# Altium PCB USF-IEEE-CS.PcbDoc
Units mm, origin at the board's own origin, x right, y up, seen from the top; angles counter-clockwise.
Board outline 35.56 x 25.88 mm, 4 copper layers (Top Layer, Mid Layer 1, Mid Layer 2, Bottom Layer), stack 1.57 mm thick; 44 components, 35 nets, 220 pads, 47 vias.
Unrouted connection lines stored in the file: 93.
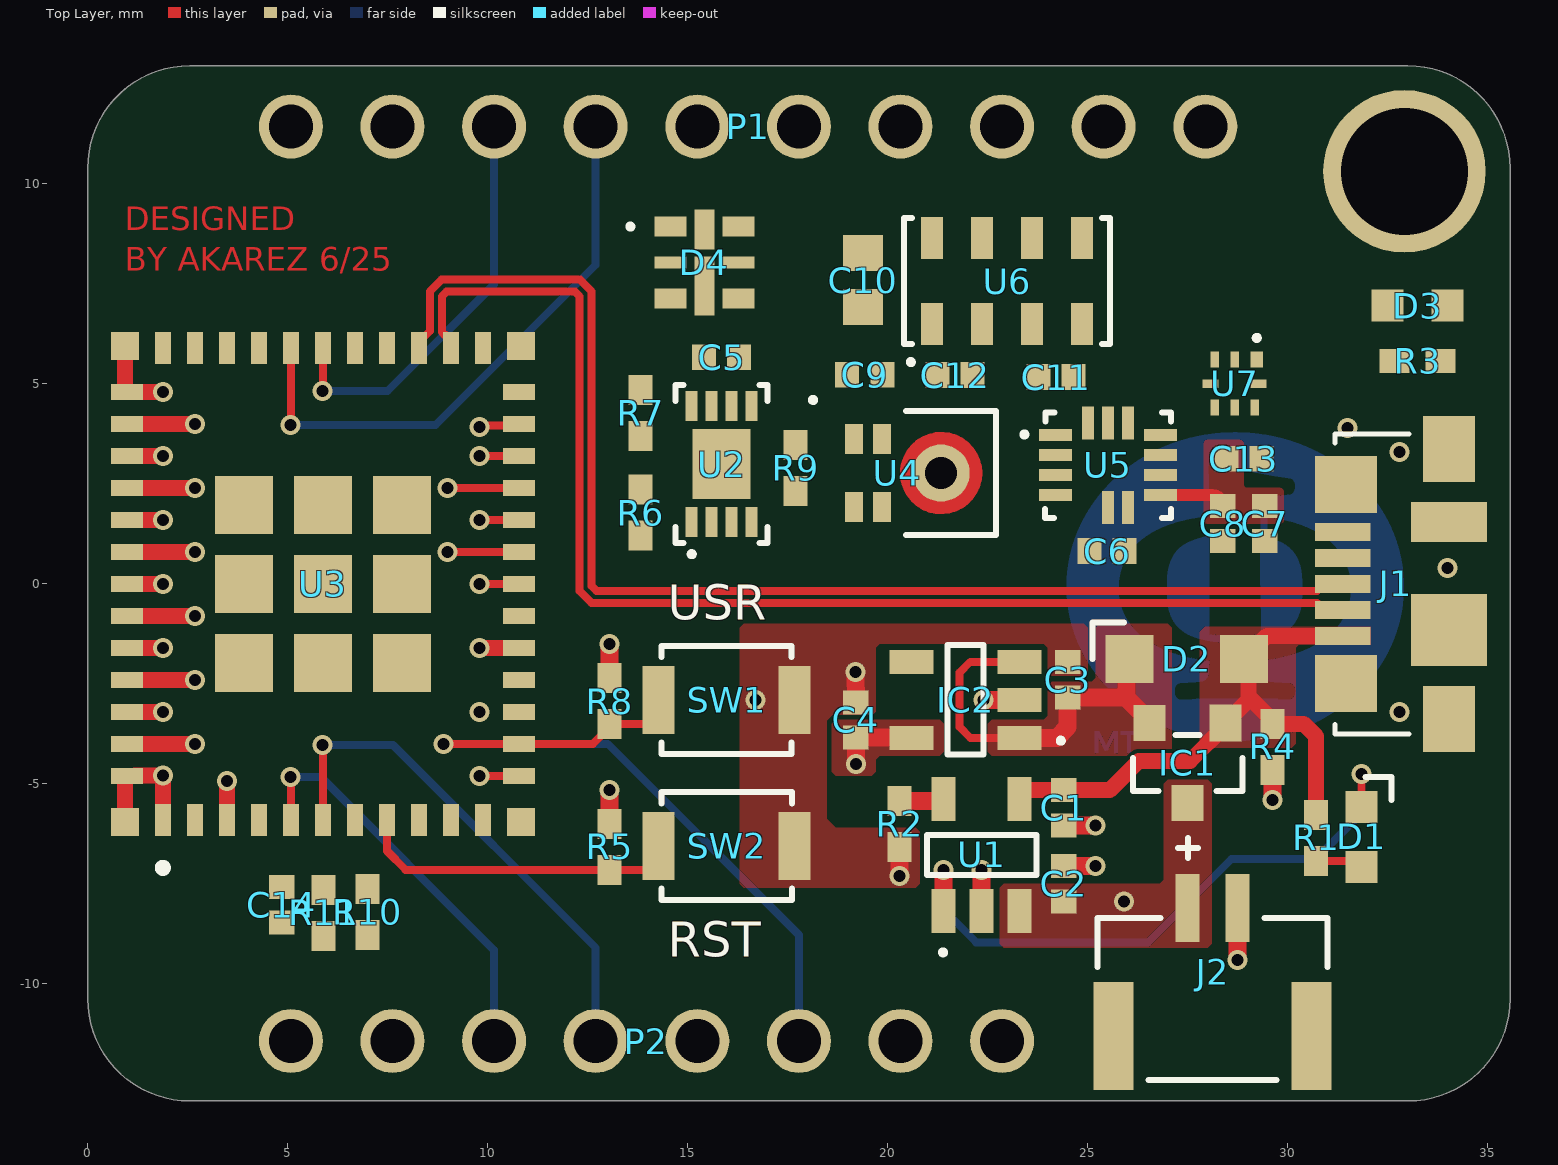
[diagram p0: Top Layer view]
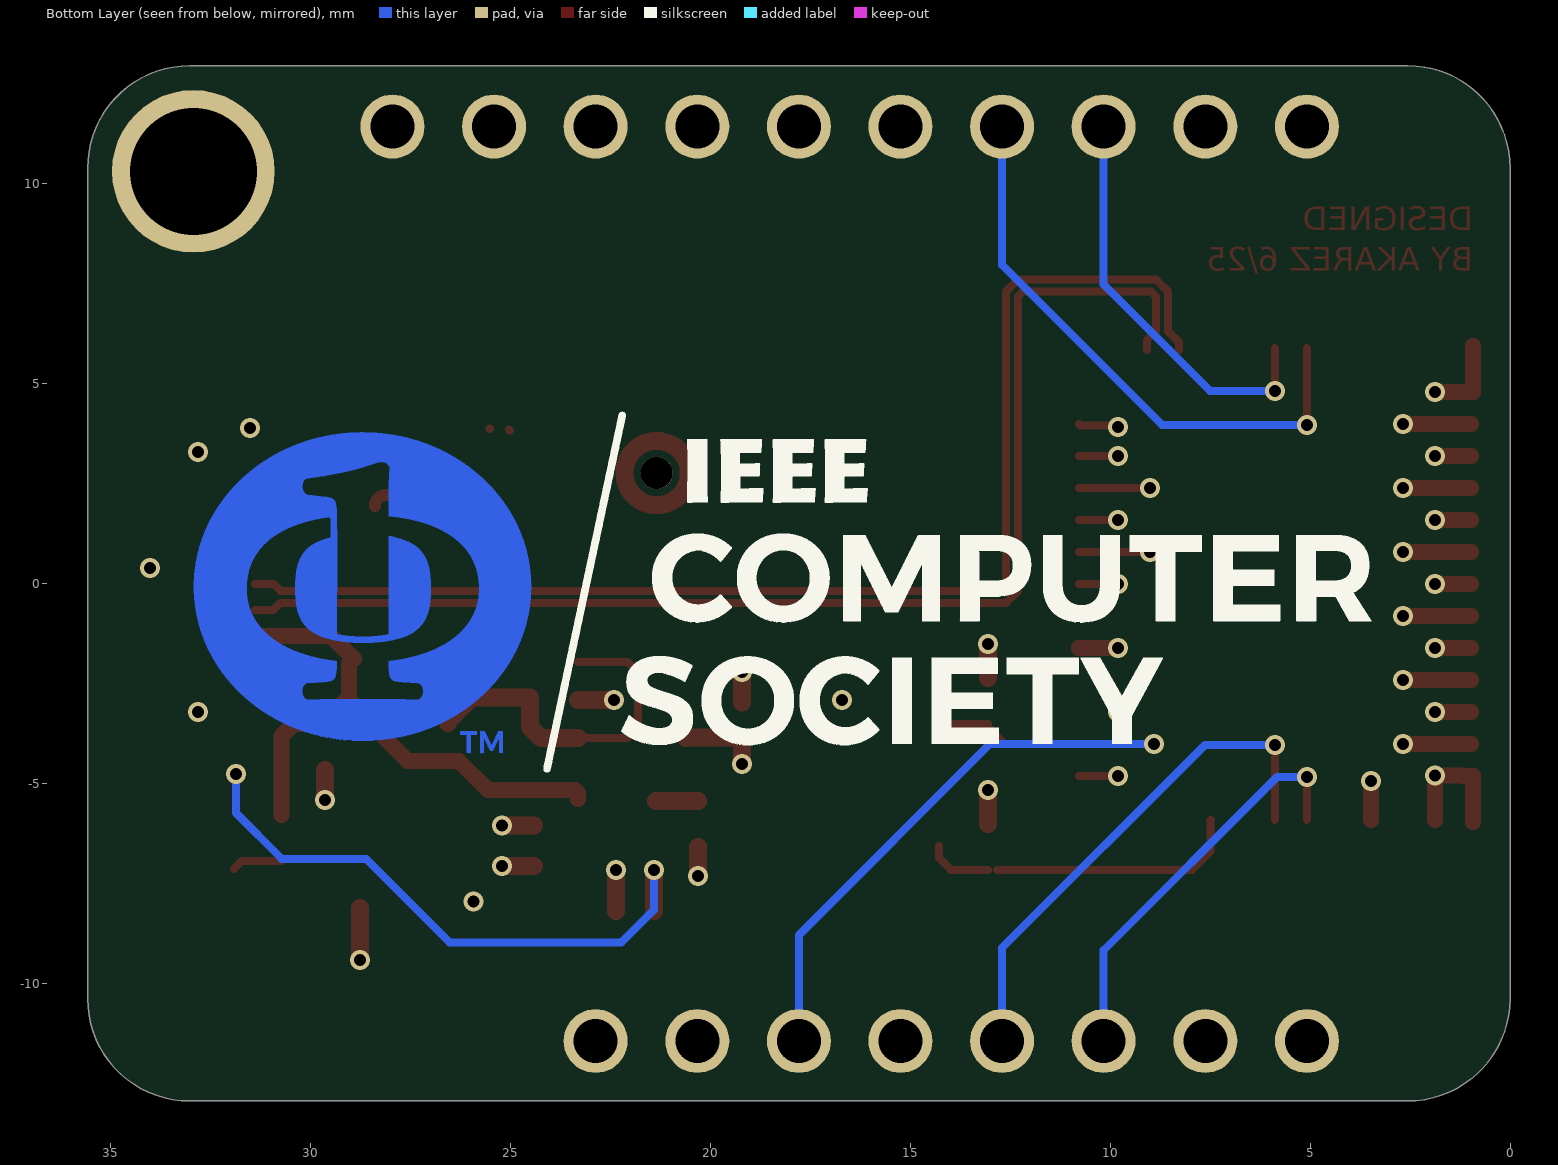
[diagram p1: Bottom Layer view, seen from below]
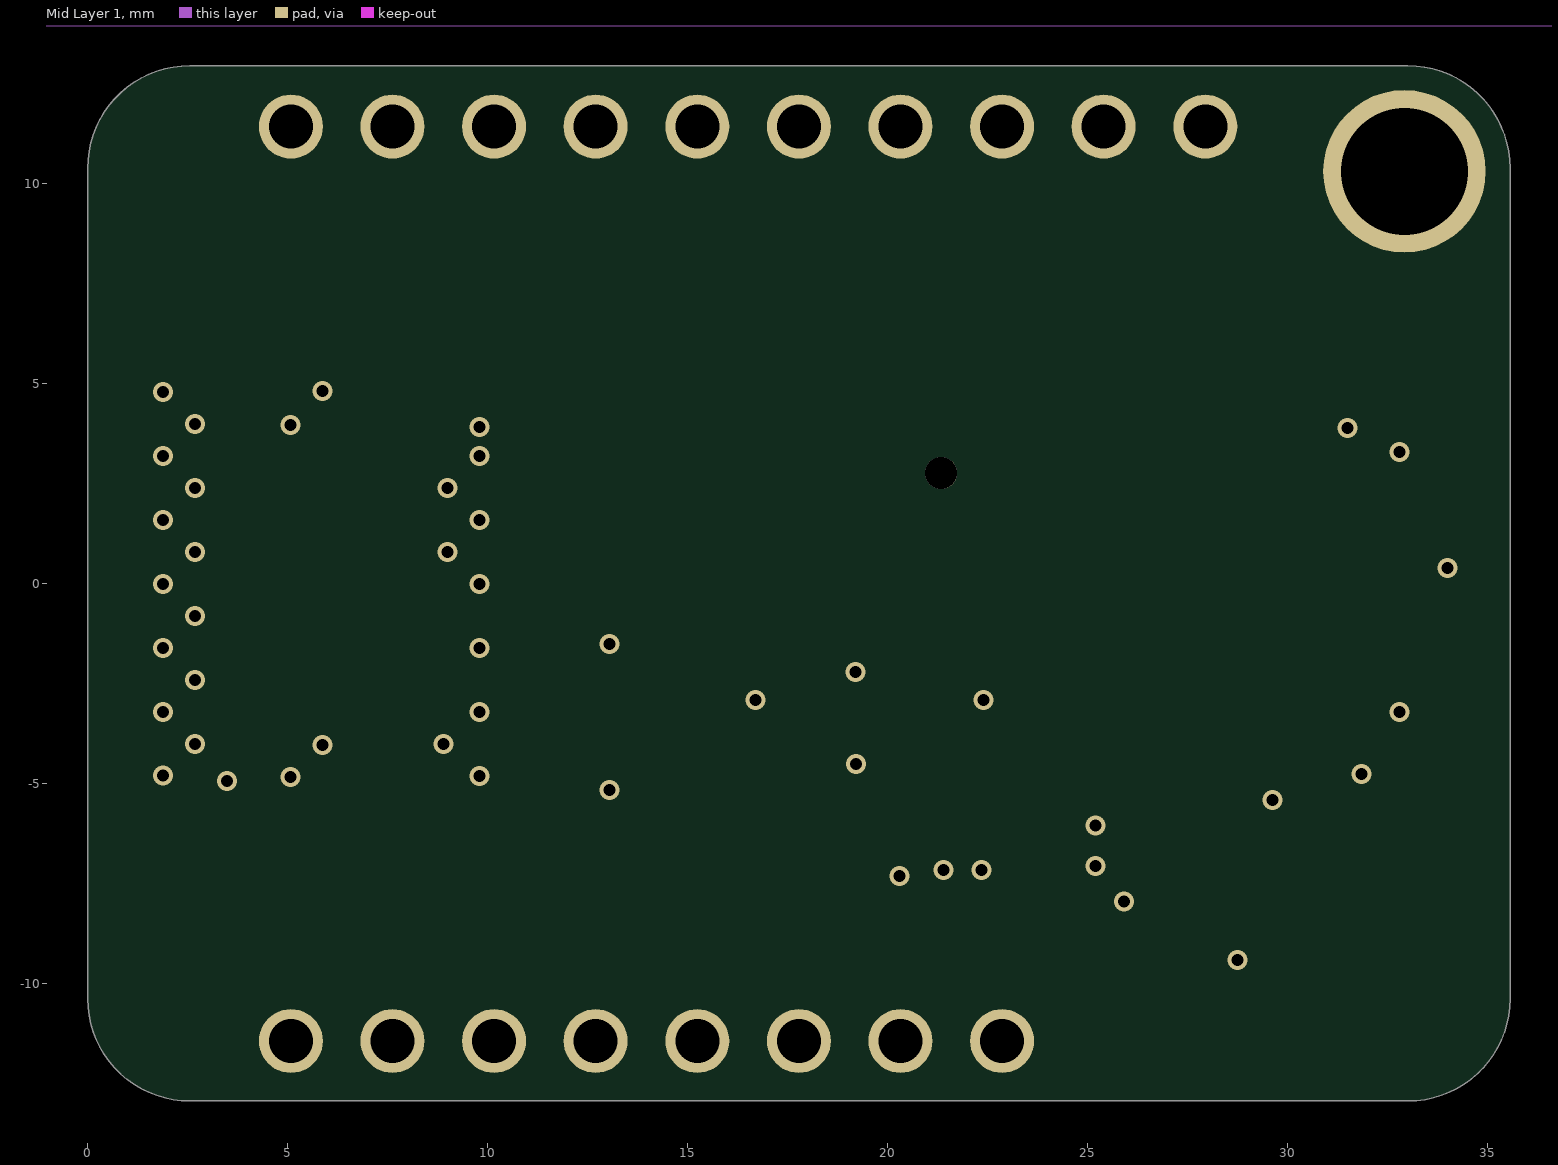
[diagram p2: Mid Layer 1]
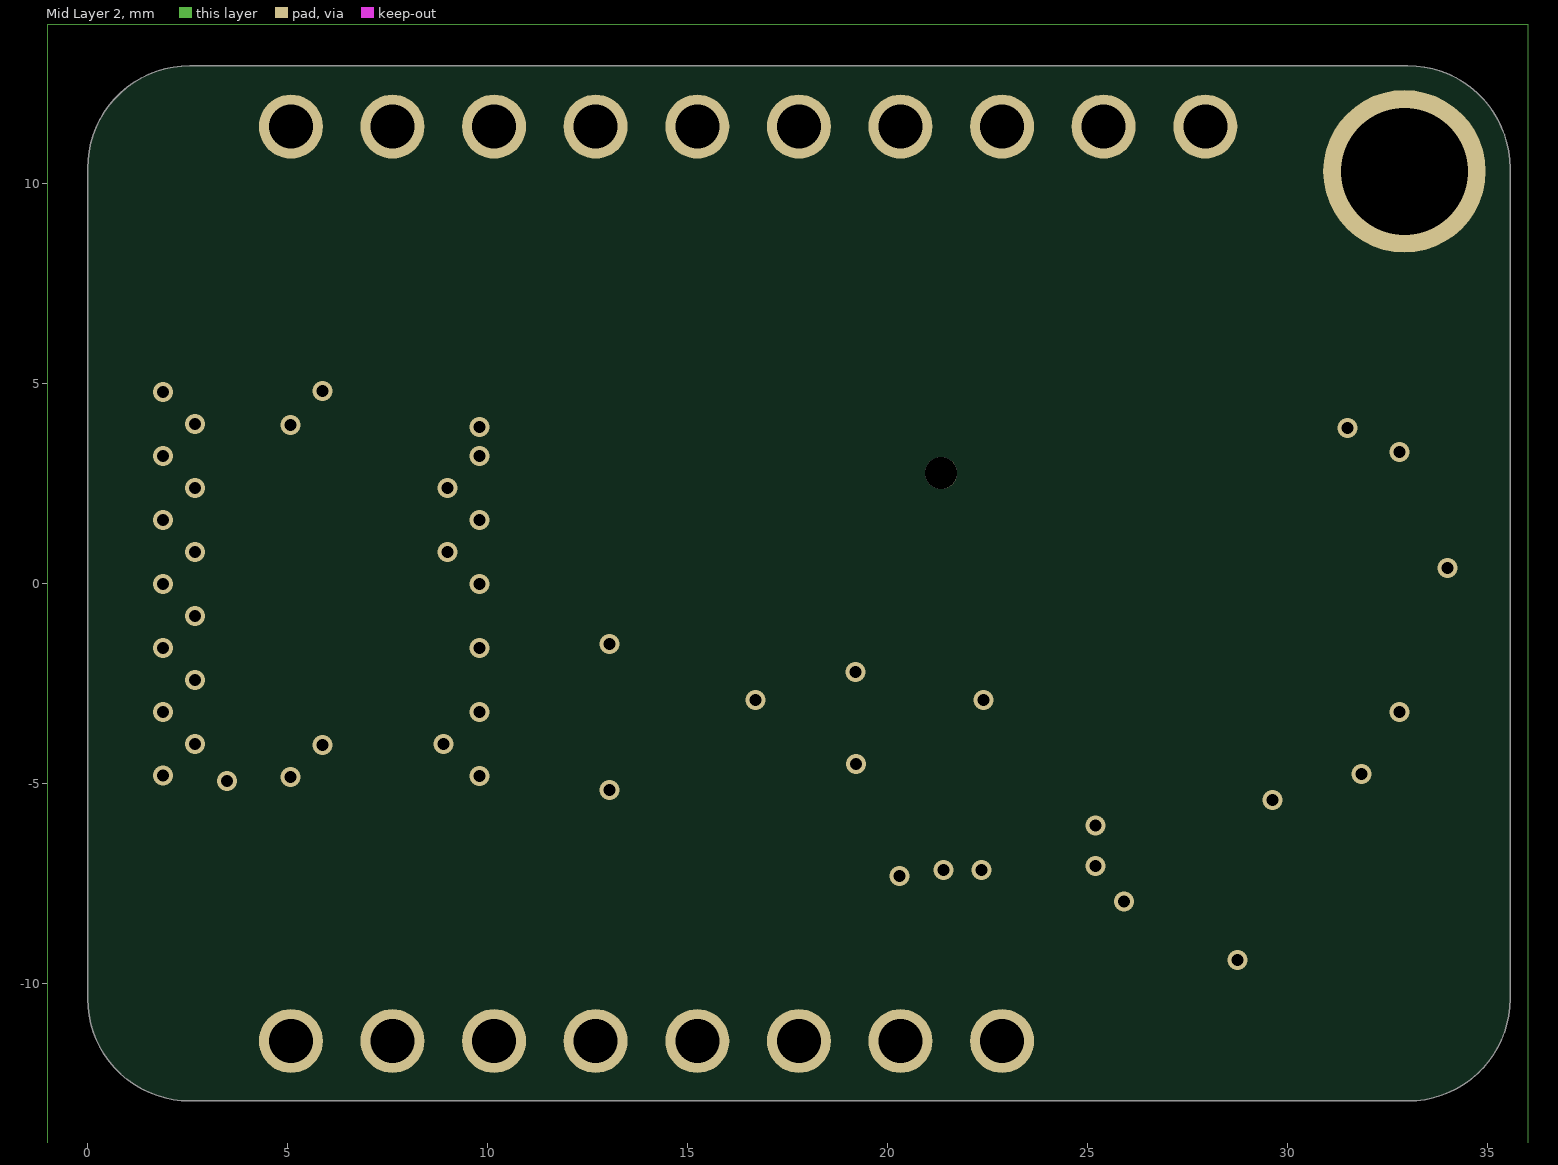
[diagram p3: Mid Layer 2]

## Layer stack, top to bottom
Top Solder: solder mask 0.0127, Solder Resist, Dk 3.8
Top Layer: signal copper 0.035
Dielectric 1: prepreg 0.2, 7628, Dk 4.6
Mid Layer 1: signal copper 0.0175
Core: core 1.065, FR-4, Dk 4.5
Mid Layer 2: signal copper 0.0175
Dielectric 2: prepreg 0.2, 7628, Dk 4.6
Bottom Layer: signal copper 0.035
Bottom Solder: solder mask 0.0127, Solder Resist, Dk 3.8

## Board outline
2.558,-12.929 cw(c2.558,-10.371) 0,-10.371 0,10.396 cw(c2.558,10.396) 2.558,12.954 33.002,12.954 cw(c33.002,10.396) 35.56,10.396 35.56,-10.379 cw(c33.012,-10.379) 33.012,-12.927

## Design rules (kind name [scope] priority, off if disabled: settings)
BoardOutlineClearance [All] p1: gap=0.2 ignorepadtopadclearanceinfootprint=FALSE
Clearance [All] p1: gap=0.102 ignorepadtopadclearanceinfootprint=FALSE except(0.127: Arc-Via Track-Via SMDPad-Via THPad-Via Via-Via Via-Fill Via-Poly Via-Region Via-Text; 0.25: Arc-Hole Track-Hole SMDPad-Hole THPad-Hole Via-Hole Fill-Hole Poly-Hole Region-Hole Text-Hole)
ComponentClearance [All] p1: gap=0.102 collisioncheckmode=3 verticalgap=0.102 showdistances=TRUE
DiffPairsRouting [All] p1: maxlimit=0.102 minlimit=0.102 mostfreqgap=0.102 toplayer_minwidth=0.102 toplayer_maxwidth=1816.048 toplayer_prefwidth=0.102 midlayer1_minwidth=0.102 midlayer1_maxwidth=1816.048 midlayer1_prefwidth=0.102 midlayer2_minwidth=0.102 midlayer2_maxwidth=1816.048 midlayer2_prefwidth=0.102 bottomlayer_minwidth=0.102 bottomlayer_maxwidth=1816.048 bottomlayer_prefwidth=0.102 maxuncoupledlength=12.7
Height [All] p1: minheight=0 maxheight=1816.048 prefheight=12.7
HoleSize [All] p1: absolutevalues=TRUE maxlimit=6.3 minlimit=0.2 maxpercent=80.000 minpercent=20.000
HoleToHoleClearance [All] p1: gap=0.25 allowstackedmicrovias=FALSE
MinimumAnnularRing [All] p1: minimumring=0.076
MinimumSolderMaskSliver [All] p1: minsoldermaskwidth=0
PlaneClearance [All] p1: clearance=0.102
PlaneConnect PlaneConnectPowerPads [InPadClass('PowerPads')] p1: planeconnectstyle=Direct reliefexpansion=0.508 reliefentries=4 reliefconductorwidth=0.254 reliefairgap=0.254
PlaneConnect [All] p2: pad.planeconnectstyle=Relief pad.reliefexpansion=0.3 pad.reliefentries=4 pad.reliefconductorwidth=0.102 pad.reliefairgap=0.102 via.planeconnectstyle=Direct via.reliefexpansion=0.3 via.reliefentries=4 via.reliefconductorwidth=0.127 via.reliefairgap=0.127
PolygonConnect PolygonConnectPowerPads [All vs (InPadClass('PowerPads'))] p1: connectstyle=Direct reliefconductorwidth=0.254 reliefentries=4 polygonreliefangle="90 Angle" airgapwidth=0.254
PolygonConnect [All] p2: thpad.connectstyle=Relief thpad.reliefconductorwidth=0.102 thpad.reliefentries=4 thpad.polygonreliefangle="90 Angle" thpad.airgapwidth=0.102 smdpad.connectstyle=Direct smdpad.reliefconductorwidth=0.102 smdpad.reliefentries=4 smdpad.polygonreliefangle="90 Angle" smdpad.airgapwidth=0.102 via.connectstyle=Direct via.reliefconductorwidth=0.127 via.reliefentries=4 via.polygonreliefangle="90 Angle" via.airgapwidth=0.127
RoutingVias [All] p1: holewidth=0.2 width=0.45 viastyle="Through Hole" minholewidth=0.2 minwidth=0.45 maxholewidth=6.3 maxwidth=6.55
SilkToSilkClearance [All] p1: silktosilkclearance=0
SilkToSolderMaskClearance [IsPad] p1: minsilkscreentomaskgap=0.102 clearancetoexposedcopper=TRUE
SolderMaskExpansion [All] p1: expansion=0.075 istentingtop=FALSE
SupplyNets "Schematic Supply Nets_3" [InNet('GND')] p1: voltage=0.000
SupplyNets "Schematic Supply Nets_2" [InNet('+VBAT')] p2: voltage=0.000
SupplyNets "Schematic Supply Nets_1" [InNet('+VUSB')] p3: voltage=0.000
SupplyNets "Schematic Supply Nets" [InNet('+3V3')] p4: voltage=0.000
Width [All] p1: maxlimit=1816.048 minlimit=0.102 preferedwidth=0.102
20 further rules are at their usual default settings.

## Classes and differential pairs
differential pair USB_D: +USB_D_P -USB_D_N

## Components (designator, comment, footprint, x,y, rotation, side; value= is the part's Value field where it differs from the comment)
C1 "4.7 µF" "CAP 0402_1005" 24.4,-5.6 r90 top
C2 "4.7 µF" "CAP 0402_1005" 24.4,-7.5 r270 top
C3 "1 µ" "CAP 0402_1005" 24.5,-2.4 r270 top
C4 "1 µ" "CAP 0402_1005" 19.202,-3.404 r270 top
C5 "0.1 µF" "CAP 0402_1005" 15.85,5.664 r180 top
C6 "2.2 µF" "CAP 0402_1005" 25.485,0.82 r180 top
C7 "0.1 µF" "CAP 0402_1005" 29.431,1.506 r90 top
C8 "0.1 µF" "CAP 0402_1005" 28.381,1.506 r90 top
C9 "1 µ" "CAP 0402_1005" 19.425,5.226 r0 top
C10 "10 µF" "CAP 0603_1608" 19.387,7.594 r270 top
C11 "0.1 µF" "CAP 0402_1005" 24.212,5.169 r0 top
C12 "0.1 µF" "CAP 0402_1005" 21.687,5.219 r180 top
C13 "0.1 µF" "CAP 0402_1005" 28.905,3.124 r180 top
C14 "0.1 µF" "CAP 0402_1005" 4.85,-8.025 r90 top
D1 "Red" "LED 0603_1608 RED" 31.852,-6.325 r90 top
D2 "MBR120ESFT1G" SOD123F 27.475,-1.875 r180 top
D3 "Blue" "LED 0603_1608 BLUE" 33.247,6.957 r0 top
D4 "3341" FP-3341-MFG 15.418,8.032 r0 top
IC1 "DMG2305UX-13" "DIODES SOT-23-3" 27.5,-4.475 r270 top
IC2 "AP2112K-3.3TRG1" "DIODES SOT-23-5 W5" 21.95,-2.9 r180 top
J1 "47346-0001" MOLEX_47346-0001 34.036,0 r90 top locked
J2 "SM02B-GHS-TB(LF)(SN)" FP-SM02B-GHS-TB_LF_SN-MFG 28.125,-10.375 r0 top locked
P1 "61301011121" 61301011121 16.51,11.43 r0 top locked
P2 "61300811121" 61300811121 13.97,-11.43 r0 top locked
R1 "200 R" "RES 0402_1005" 30.709,-6.35 r90 top
R2 "2 k" "RES 0402_1005" 20.3,-6 r270 top
R3 "200 R" "RES 0402_1005" 33.25,5.575 r0 top
R4 "10 k" "RES 0402_1005" 29.625,-4.075 r270 top
R5 "10 k" "RES 0402_1005" 13.05,-6.575 r90 top
R6 "10 k" "RES 0402_1005" 13.822,1.778 r270 top
R7 "10 k" "RES 0402_1005" 13.822,4.267 r90 top
R8 "10 k" "RES 0402_1005" 13.05,-2.932 r90 top
R9 "100 R" "RES 0402_1005" 17.7,2.901 r270 top
R10 "30 k" "RES 0402_1005" 7,-8.2 r270 top
R11 "10 k" "RES 0402_1005" 5.9,-8.225 r90 top
SW1 "B3U-1000P" FP-B3U-1000P-MFG 15.975,-2.9 r0 top
SW2 "B3U-1000P" FP-B3U-1000P-MFG 15.975,-6.55 r180 top
U1 "MCP73831T-2ATI/OT" FP-C04-091-OT-MFG 22.35,-6.775 r90 top
U2 "MCP9808T-E/MC" MCHP-DFN-MC8_V 15.852,2.991 r90 top
U3 "ESP32-C3-MINI-1-H4" ESP32C3MINI1H4 5.88,0 r90 top locked
U4 "IM69D130V01XTSA1" FP-PG-LLGA-5-MFG 20.656,2.769 r0 top
U5 "ICM-42605" FP-ICM-42605-MFG 25.507,2.967 r0 top
U6 "MPL3115A2ST1" FRES-2153-01_V 22.987,7.569 r90 top
U7 "NT3H2111W0FHKH" NT3H2111W0FHKH-FP 28.677,5.004 r270 top

## Footprints (in the part's own frame and the unit in brackets; to place one, negate y for a bottom-side part, rotate by r counter-clockwise, add the part's x,y. Pads: shape width x height; smd on the part's side, far side on the other; paste and mask are expansions set on the pad)
61300811121 [mm] "Pin Header, pitch 2.54 mm, THT, Vertical, single row, 8p"
  round 1.6 hole 1.1: 1(-8.89,0) 2(-6.35,0) 3(-3.81,0) 4(-1.27,0) 5(1.27,0) 6(3.81,0) 7(6.35,0) 8(8.89,0)
  body extent -10.16,-1.27 10.16,1.27, height 8.57
61301011121 [mm] "Pin Header, pitch 2.54 mm, THT, Vertical, single row, 10p"
  round 1.6 hole 1.1: 1(-11.43,0) 2(-8.89,0) 3(-6.35,0) 4(-3.81,0) 5(-1.27,0) 6(1.27,0) 7(3.81,0) 8(6.35,0) 9(8.89,0) 10(11.43,0)
  body extent -12.7,-1.27 12.7,1.27, height 8.57
"CAP 0402_1005" [mm] "Chip Capacitor, 2-Leads, Body 1.02x0.51mm, IPC Medium Density"
  rect 0.6x0.64 smd: 1(-0.44,0) 2(0.44,0)
  body extent -0.5,-0.26 0.5,0.26, height 0.52
"CAP 0603_1608" [mm] "Chip Capacitor, 2-Leads, Body 1.60x0.80mm, IPC Medium Density"
  rect 0.9x1 smd: 1(-0.675,0) 2(0.675,0)
  body extent -0.8,-0.41 0.8,0.41, height 0.82
"DIODES SOT-23-3" [mm] "SOT23, 3-Leads, Body 2.90x2.40mm, Pitch 0.95mm, IPC Medium Density"
  rect 0.925x0.8 smd: 1(-1,0.95)
  rect 0.9x0.8 smd: 2(-1,-0.95) 3(1,0)
  silkscreen extent -0.7,-1.37 0.7,1.37, body extent -1.41,-1.45 1.41,1.45, height 1.5
"DIODES SOT-23-5 W5" [mm] "SOT23, 5-Leads, Body 3.00x2.85mm, Pitch 0.95mm, IPC Medium Density"
  rect 1.1x0.6 smd: 1(-1.35,0.95) 2(-1.35,0) 3(-1.35,-0.95) 4(1.35,-0.95) 5(1.35,0.95)
  silkscreen extent -2.43,-1.37 0.45,1.37, body extent -1.41,-1.45 1.41,1.45, height 1.5
ESP32C3MINI1H4 [mm]
  rect 0.8x0.4 smd: 1(-5.9,4) 2(-5.9,3.2) 3(-5.9,2.4) 4(-5.9,1.6) 5(-5.9,0.8) 6(-5.9,0) 7(-5.9,-0.8) 8(-5.9,-1.6) 9(-5.9,-2.4) 10(-5.9,-3.2) 11(-5.9,-4) 25(5.9,-4) 26(5.9,-3.2) 27(5.9,-2.4) 28(5.9,-1.6) 29(5.9,-0.8) 30(5.9,0) 31(5.9,0.8) 32(5.9,1.6) 33(5.9,2.4) 34(5.9,3.2) 35(5.9,4)
  rect 0.4x0.8 smd: 12(-4.8,-4.9) 13(-4,-4.9) 14(-3.2,-4.9) 15(-2.4,-4.9) 16(-1.6,-4.9) 17(-0.8,-4.9) 18(0,-4.9) 19(0.8,-4.9) 20(1.6,-4.9) 21(2.4,-4.9) 22(3.2,-4.9) 23(4,-4.9) 24(4.8,-4.9) 36(4.8,4.9) 37(4,4.9) 38(3.2,4.9) 39(2.4,4.9) 40(1.6,4.9) 41(0.8,4.9) 42(0,4.9) 43(-0.8,4.9) 44(-1.6,4.9) 45(-2.4,4.9) 46(-3.2,4.9) 47(-4,4.9) 48(-4.8,4.9)
  rect 1.45x1.45 smd: 49(0,0) 50(1.975,1.975) 51(0,1.975) 52(-1.975,1.975) 53(-1.975,0) 54(-1.975,-1.975) 55(0,-1.975) 56(1.975,-1.975) 57(1.975,0)
  rect 0.7x0.7 smd: 58(-5.95,4.95) 59(-5.95,-4.95) 60(5.95,-4.95) 61(5.95,4.95)
  silkscreen extent -7.2,3.9 -7,4.1, body extent -6.6,-5.6 6.6,11, height 2.55
FP-3341-MFG [mm]
  rect 0.8x0.5 smd paste+0 mask+0.051: 1(-0.85,0.9) 3(-0.85,-0.9) 4(0.85,-0.9) 6(0.85,0.9)
  rect 0.8x0.3 smd paste+0 mask+0.051: 2(-0.85,0) 5(0.85,0)
  rect 0.5x1 smd paste+0 mask+0.051: 7(0,0.83)
  rect 0.5x1.48 smd paste+0 mask+0.051: 8(0,-0.59)
  silkscreen extent -1.9,0.85 -1.8,0.95, body extent -1.35,-1.43 1.35,1.43, height 0.25
FP-B3U-1000P-MFG [mm]
  rect 0.8x1.7 smd paste+0 mask+0.1: 1(-1.7,0) 2(1.7,0)
  silkscreen extent -1.63,-1.35 1.63,1.35, body extent -2.2,-1.45 2.2,1.45, height 0.25
FP-C04-091-OT-MFG [mm]
  rect 1.1x0.6 smd: 1(-1.4,0.95) 2(-1.4,0) 3(-1.4,-0.95) 4(1.4,-0.95) 5(1.4,0.95)
  silkscreen extent -2.49,-1.37 0.5,1.37, body extent -1.36,-1.45 1.36,1.45, height 1.19
FP-ICM-42605-MFG [mm]
  rect 0.825x0.3 smd paste+0 mask+0.05: 1(-1.31,0.75) 2(-1.31,0.25) 3(-1.31,-0.25) 4(-1.31,-0.75) 8(1.31,-0.75) 9(1.31,-0.25) 10(1.31,0.25) 11(1.31,0.75)
  rect 0.3x0.825 smd paste+0 mask+0.05: 6(0,-1.06) 7(0.5,-1.06) 12(0.5,1.06) 13(0,1.06) 14(-0.5,1.06)
  silkscreen extent -2.14,-1.32 1.57,1.32, body extent -1.5,-1.25 1.5,1.25, height 0.97
FP-PG-LLGA-5-MFG [mm]
  rect 0.45x0.75 smd paste-1000 mask+0.1: 1(-1.5,0.85) 2(-0.8,0.85) 3(-1.5,-0.85) 4(-0.8,-0.85)
  round 1.431 smd paste-1000 mask-1000: 5(0.68,0)
  round 0.8 hole 0.8 unplated paste-2539.97 mask+0: ""(0.68,0)
  Top Layer circle w0.45: c0.68,0 r0.805
  silkscreen extent -2.57,-1.55 2.05,1.88, body extent -2.15,-1.65 2.15,1.65, height 0.25
FP-SM02B-GHS-TB_LF_SN-MFG [mm]
  rect 0.6x1.7 smd paste+0 mask+0.1: 1(0.625,2.275) 2(-0.625,2.275)
  rect 1x2.7 smd paste+0 mask+0.1: 3(-2.475,-0.925) 4(2.475,-0.925)
  silkscreen extent -2.88,-2.02 2.88,2.02, body extent -3.08,-2.37 3.08,3.22, height 0.25
FRES-2153-01_V [mm] "LGA, 8-Leads, Body 5x3mm, Pitch 1.25mm"
  rect 1.05x0.55 smd: 1(-1.075,1.875) 2(-1.075,0.625) 3(-1.075,-0.625) 4(-1.075,-1.875) 5(1.075,-1.875) 6(1.075,-0.625) 7(1.075,0.625) 8(1.075,1.875)
  silkscreen extent -2.08,-2.58 1.58,2.58, body extent -1.5,-2.5 1.5,2.5, height 1.2
"LED 0603_1608 BLUE" [mm] "Chip Diode, 2-Leads, Body 1.60x0.80mm, IPC Medium Density"
  rect 0.8x0.8 smd: 1(-0.75,0) 2(0.75,0)
  body extent -0.8,-0.4 0.8,0.4, height 0.53
"LED 0603_1608 RED" [mm] "Chip Diode, 2-Leads, Body 1.60x0.80mm, IPC Medium Density"
  rect 0.8x0.8 smd: 1(-0.75,0) 2(0.75,0)
  body extent -0.8,-0.4 0.8,0.4, height 0.53
MCHP-DFN-MC8_V [mm] "SON, 8-Leads, Body 3x2mm, Pitch 0.5mm, Thermal Pad 1.45x1.75mm"
  rect 0.75x0.3 smd mask+0.05: 1(-1.45,0.75) 2(-1.45,0.25) 3(-1.45,-0.25) 4(-1.45,-0.75) 5(1.45,-0.75) 6(1.45,-0.25) 7(1.45,0.25) 8(1.45,0.75)
  rect 1.75x1.45 smd mask+0.05: 9(0,0)
  silkscreen extent -2.3,-1.15 1.97,1.15, body extent -1.5,-1 1.5,1, height 1
MOLEX_47346-0001 [mm]
  rect 0.45x1.38 smd: 1(-1.3,2.66) 2(-0.65,2.66) 3(0,2.66) 4(0.65,2.66) 5(1.3,2.66)
  rect 1.425x1.55 smd: S1(-2.488,2.575) S2(2.488,2.575)
  rect 1.65x1.3 smd: S3(-3.375,0) S6(3.375,0)
  rect 1.8x1.9 smd: S4(-1.15,0)
  rect 1x1.9 smd: S5(1.55,0)
  silkscreen extent -3.75,1 3.75,2.85, body extent -4.18,-2.55 4.18,2.88, height 2.7
NT3H2111W0FHKH-FP [mm] "8-XFQFN Exposed Pad"
  rect 0.4x0.32 smd paste-1000 mask-1000: 1(-0.6,0.55)
  rect 0.4x0.22 smd paste-1000 mask-1000: 2(-0.6,0) 3(-0.6,-0.5) 5(0.6,-0.5) 6(0.6,0) 7(0.6,0.5)
  rect 0.22x0.4 smd paste-1000 mask-1000: 4(0,-0.6) 8(0,0.6)
  silkscreen extent -1.19,0.5 -1.09,0.6, body extent -0.95,-0.95 0.95,0.95, height 0.25
"RES 0402_1005" [mm] "Chip Resistor, 2-Leads, Body 1.0x0.5mm, IPC Medium Density"
  rect 0.75x0.6 smd: 1(-0.575,0) 2(0.575,0)
  body extent -0.5,-0.25 0.5,0.25, height 0.35
SOD123F [mm] "SODFL, 2-Leads, Body 1.60x3.50mm, IPC Medium Density"
  rect 1.2x1.2 smd: 1(-1.43,0) 2(1.43,0)
  body extent -1.75,-0.8 1.75,0.8, height 1.1

## Part data
C1 C2: library part CL05A475KP5NRNC, "CAP CER 4.7UF 10V X5R 0402", Capacitance="4.7 µ", Device Package="0402 (1005 Metric)", Manufacturer="Samsung Electro-Mechanics", Operating Temperature="-55°C ~ 85°C", Supplier Part Number 1=1276-1480-1-ND, Temperature Coefficient=X5R, Tolerance=±10%, Voltage - Rated=10V, Applications="General Purpose", ComponentLink1Description=Datasheet, ComponentLink1URL=http://www.samsungsem.com/kr/support/product-search/mlcc/CL05A475KP5NRNC.jsp, ComponentLink2Description="DigiKey Link", ComponentLink2URL=https://www.digikey.com/en/products/detail/samsung-electro-mechanics/CL05A475KP5NRNC/3887138, lastupdated="2/9/2024 8:04:37 PM", Lifecycle Status=Active, Minimum Order=1, Mounting Type="Surface Mount, MLCC", Package / Case="0402 (1005 Metric)", Packaging=TapeAndReel, Part Number=CL05A475KP5NRNC, Part Status=Active, partid=2191, Price=0.04, Series=CL, Size / Dimension="0.039\" L x 0.020\" W (1.00mm x 0.50mm)", Supplier 1=DigiKey, Thickness (Max)="0.026\" (0.65mm)"
C3 C4 C9: library part 885012105012, "CAP CER 1UF 10V X5R 0402", Capacitance="1 µF", Device Package="0402 (1005 Metric)", Manufacturer="Würth Elektronik", Operating Temperature="-55°C ~ 85°C", Supplier Part Number 1=732-7489-1-ND, Temperature Coefficient=X5R, Tolerance=±20%, Voltage - Rated=10V, Applications="General Purpose", ComponentLink1Description=Datasheet, ComponentLink1URL=https://katalog.we-online.de/pbs/datasheet/885012105012.pdf, ComponentLink2Description="DigiKey Link", ComponentLink2URL=https://www.digikey.com/en/products/detail/würth-elektronik/885012105012/5453344, lastupdated="2/9/2024 8:04:38 PM", Lifecycle Status=Active, Minimum Order=1, Mounting Type="Surface Mount, MLCC", Package / Case="0402 (1005 Metric)", Packaging=TapeAndReel, Part Number=885012105012, Part Status=Active, partid=1807, Price=0.16, Series=WCAP-CSGP, Size / Dimension="0.039\" L x 0.020\" W (1.00mm x 0.50mm)", Supplier 1=DigiKey, Thickness (Max)="0.022\" (0.55mm)"
C5 C7 C8 C11 C12 C13 C14: library part CGA2B3X5R1H104M050BB, "CAP CER 0.1UF 50V X5R 0402", Capacitance="0.1 µ", Device Package="0402 (1005 Metric)", Manufacturer="TDK Corporation", Operating Temperature="-55°C ~ 85°C", Ratings=AEC-Q200, Supplier Part Number 1=445-12214-1-ND, Temperature Coefficient=X5R, Tolerance=±20%, Voltage - Rated=50V, Applications=Automotive, ComponentLink1Description=Datasheet, ComponentLink1URL=https://product.tdk.com/info/en/catalog/datasheets/mlcc_automotive_general_en.pdf?ref_disty=digikey, ComponentLink2Description="DigiKey Link", ComponentLink2URL=https://www.digikey.com/en/products/detail/tdk-corporation/CGA2B3X5R1H104M050BB/3949450, lastupdated="2/9/2024 8:04:38 PM", Lifecycle Status=Active, Minimum Order=1, Mounting Type="Surface Mount, MLCC", Package / Case="0402 (1005 Metric)", Packaging=TapeAndReel, Part Number=CGA2B3X5R1H104M050BB, Part Status=Active, partid=1792, Price=0.01, Series=CGA, Size / Dimension="0.039\" L x 0.020\" W (1.00mm x 0.50mm)", Supplier 1=DigiKey, Thickness (Max)="0.022\" (0.55mm)"
C6: library part TMK105CBJ225KV-F, "CAP CER 2.2UF 25V X5R 0402", Capacitance="2.2 µ", Device Package="0402 (1005 Metric)", Manufacturer="Taiyo Yuden", Operating Temperature="-55°C ~ 85°C", Supplier Part Number 1=587-6277-1-ND, Temperature Coefficient=X5R, Tolerance=±10%, Voltage - Rated=25V, Applications="SMPS Filtering", ComponentLink1Description=Datasheet, ComponentLink1URL="https://ds.yuden.co.jp/TYCOMPAS/ut/detail?pn=TMK105CBJ225KV-F &u=M", ComponentLink2Description="DigiKey Link", ComponentLink2URL=https://www.digikey.com/en/products/detail/taiyo-yuden/TMK105CBJ225KV-F/7403799, lastupdated="2/9/2024 8:04:38 PM", Lifecycle Status=Active, Minimum Order=1, Mounting Type="Surface Mount, MLCC", Package / Case="0402 (1005 Metric)", Packaging=TapeAndReel, Part Number=TMK105CBJ225KV-F, Part Status=Active, partid=1822, Price=0.02, Series=M, Size / Dimension="0.039\" L x 0.020\" W (1.00mm x 0.50mm)", Supplier 1=DigiKey, Thickness (Max)="0.028\" (0.70mm)"
C10: library part GRT188R61C106ME13D, "CAP CER 10UF 16V X5R 0603", Capacitance="10 µ", Device Package="0603 (1608 Metric)", Manufacturer="Murata Electronics", Operating Temperature="-55°C ~ 85°C", Ratings=AEC-Q200, Supplier Part Number 1=490-12318-1-ND, Temperature Coefficient=X5R, Tolerance=±20%, Voltage - Rated=16V, Applications=Automotive, ComponentLink1Description=Datasheet, ComponentLink1URL=https://search.murata.co.jp/Ceramy/image/img/A01X/G101/ENG/GRT188R61C106ME13-01.pdf, ComponentLink2Description="DigiKey Link", ComponentLink2URL=https://www.digikey.com/en/products/detail/murata-electronics/GRT188R61C106ME13D/5416740, lastupdated="2/9/2024 8:10:30 PM", Lifecycle Status=Active, Minimum Order=1, Mounting Type="Surface Mount, MLCC", Package / Case="0603 (1608 Metric)", Packaging=TapeAndReel, Part Number=GRT188R61C106ME13D, Part Status=Active, partid=2515, Price=0.06, Series=GRT, Size / Dimension="0.063\" L x 0.031\" W (1.60mm x 0.80mm)", Supplier 1=DigiKey, Thickness (Max)="0.035\" (0.90mm)"
D1: library part XZMDK53W-8ST, "LED RED CLEAR CHIP SMD", Current - Test=20mA, Device Package="0603 (1608 Metric)", Lens Color=Colorless, Manufacturer=SunLED, Millicandela Rating=507mcd, Supplier Device Package="Chip LED", Supplier Part Number 1=1497-1427-1-ND, Voltage - Forward (Vf) (Typ)=1.95V, Color=Red, ComponentLink1Description=Datasheet, ComponentLink1URL=https://www.sunledusa.com/products/spec/XZMDK53W-8ST.pdf, ComponentLink2Description="DigiKey Link", ComponentLink2URL=https://www.digikey.com/en/products/detail/sunled/XZMDK53W-8ST/8259034, Configuration=Standard, Height (Max)=0.80mm, lastupdated="6/3/2024 7:59:48 PM", Lens Size="0.70mm Dia", Lens Style="Round with Domed Top", Lens Transparency=Clear, Lifecycle Status=Active, Minimum Order=1, Mounting Type="Surface Mount", Package / Case="0603 (1608 Metric)", Packaging=TapeAndReel, Part Number=XZMDK53W-8ST, Part Status=Active, partid=377, Price=0.07, Series=-, Size / Dimension="1.60mm L x 0.80mm W", Supplier 1=DigiKey, Viewing Angle=100°, Wavelength - Dominant=630nm, Wavelength - Peak=645nm
D2: "DIODE SCHOTTKY 20V 1A SOD123L", Current - Average Rectified (Io)=1A, Current - Reverse Leakage @ Vr="10µA @ 20V", Manufacturer="ON Semiconductor", Operating Temperature - Junction="-65°C ~ 150°C", Package / Case=SOD-123F, Supplier Device Package=SOD-123L, Supplier Part Number 1=MBR120ESFT1GOSCT-ND, Voltage - DC Reverse (Vr) (Max)=20V, Voltage - Forward (Vf) (Max) @ If="530mV @ 1A", ComponentLink1Description=Datasheet, ComponentLink1URL=http://www.onsemi.com/pub/Collateral/MBR120ESFT1-D.PDF, ComponentLink2Description="DigiKey Link", ComponentLink2URL=http://digikey.com/product-detail/en/on-semiconductor/MBR120ESFT1G/MBR120ESFT1GOSCT-ND/964525, Diode Type=Schottky, lastupdated="6/3/2024 7:54:58 PM", Lifecycle Status=Active, Minimum Order=1, Mounting Type="Surface Mount", Packaging=TapeAndReel, Part Number=MBR120ESFT1G, Part Status=Active, partid=2351, Price=0.09, Series=-, Speed="Fast Recovery =< 500ns, > 200mA (Io)", Supplier 1=DigiKey
D3: library part LTST-C193TBKT-5A, "LED BLUE CLEAR CHIP SMD", Current - Test=5mA, Device Package="0603 (1608 Metric)", Lens Color=Colorless, Manufacturer="Lite-On Inc.", Millicandela Rating=15mcd, Supplier Device Package="Chip LED", Supplier Part Number 1=160-1827-1-ND, Voltage - Forward (Vf) (Typ)=2.8V, Color=Blue, ComponentLink1Description=Datasheet, ComponentLink1URL=//media.digikey.com/pdf/Data%20Sheets/Lite-On%20PDFs/LTST-C193TBKT-5A.pdf, ComponentLink2Description="DigiKey Link", ComponentLink2URL=http://digikey.com/product-detail/en/lite-on-inc/LTST-C193TBKT-5A/160-1827-1-ND/2355044, Configuration=Standard, Height (Max)=0.45mm, lastupdated="6/3/2024 7:57:52 PM", Lens Size="1.15mm x 0.80mm", Lens Style="Rectangle with Flat Top", Lens Transparency=Clear, Lifecycle Status=Active, Minimum Order=1, Mounting Type="Surface Mount", Package / Case="0603 (1608 Metric)", Packaging=TapeAndReel, Part Number=LTST-C193TBKT-5A, Part Status=Active, partid=829, Price=0.06, Series=-, Size / Dimension="1.60mm L x 0.80mm W", Supplier 1=DigiKey, Viewing Angle=130°, Wavelength - Dominant=470nm, Wavelength - Peak=468nm
D4: library part CMP-007-00045-1, "DotStar Micro LEDs (APA102-2020) - Smart SMD RGB LED - 10 Pack"
IC1: "MOSFET P-CH 20V 4.2A SOT23", Current - Continuous Drain (Id) @ 25°C="4.2A (Ta)", Drain to Source Voltage (Vdss)="20 V", Drive Voltage (Max Rds On,  Min Rds On)="1.8V, 4.5V", Input Capacitance (Ciss) (Max) @ Vds="808 pF @ 15 V", Manufacturer="Diodes Incorporated", Operating Temperature="-55°C ~ 150°C (TJ)", Package / Case="TO-236-3, SC-59, SOT-23-3", Power Dissipation (Max)="1.4W (Ta)", Supplier Device Package=SOT-23-3, Supplier Part Number 1=DMG2305UX-13DICT-ND, ComponentLink1Description=Datasheet, ComponentLink1URL=https://www.diodes.com/assets/Datasheets/DMG2305UX.pdf, ComponentLink2Description="DigiKey Link", ComponentLink2URL=https://www.digikey.com/en/products/detail/diodes-incorporated/DMG2305UX-13/4251560, FET Type=P-Channel, Gate Charge (Qg) (Max) @ Vgs="10.2 nC @ 4.5 V", lastupdated="6/3/2024 8:15:20 PM", Lifecycle Status=Active, Minimum Order=1, Mounting Type="Surface Mount", Packaging=TapeAndReel, Part Number=DMG2305UX-13, Part Status=Active, Price=0.04, Rds On (Max) @ Id, Vgs="52mOhm @ 4.2A, 4.5V", Series=-, Supplier 1=DigiKey, Technology="MOSFET (Metal Oxide)", Vgs (Max)=±8V, Vgs(th) (Max) @ Id="900mV @ 250µA"
IC2: "IC REG LINEAR 3.3V 600MA SOT25", Current - Output=600mA, Current - Quiescent (Iq)="80 µA", Manufacturer="Diodes Incorporated", Operating Temperature="-40°C ~ 85°C", Package / Case="SC-74A, SOT-753", Supplier Device Package=SOT-25, Supplier Part Number 1=AP2112K-3.3TRG1DICT-ND, Voltage - Input (Max)=6V, Voltage - Output (Min/Fixed)=3.3V, Voltage Dropout (Max)="0.4V @ 600mA", ComponentLink1Description=Datasheet, ComponentLink1URL=https://www.diodes.com/assets/Datasheets/AP2112.pdf, ComponentLink2Description="DigiKey Link", ComponentLink2URL=https://www.digikey.com/en/products/detail/diodes-incorporated/AP2112K-3-3TRG1/4470746, Control Features=Enable, lastupdated="6/3/2024 8:17:11 PM", Lifecycle Status=Active, Minimum Order=1, Mounting Type="Surface Mount", Number of Regulators=1, Output Configuration=Positive, Output Type=Fixed, Packaging=TapeAndReel, Part Number=AP2112K-3.3TRG1, Part Status=Active, Price=0.08, Protection Features="Over Current, Over Temperature", PSRR="65sB (100Hz ~ 1KHz)", Series=-, Supplier 1=DigiKey
J1: library part CMP-002-00079-4, "USB - micro B USB 2.0 Receptacle Connector 5 Position Surface Mount, Right Angle", Case/Package=None, Availability="In Stock", Check_prices=https://www.snapeda.com/parts/47346-0001/Molex/view-part/?ref=eda, Component Type=Standard, Design Item ID=47346-0001, MF=Molex, MP=47346-0001, Pins=11, Price=None, Purchase-URL=https://pricing.snapeda.com/search/part/47346-0001/?ref=eda, SnapEDA_Link=https://www.snapeda.com/parts/47346-0001/Molex/view-part/?ref=snap, Source=47346-0001.SchLib
J2: library part CMP-002-00092-6, "MCU 32-bit LPC1800 ARM Cortex M3 RISC 768KB Flash 3.3V 100-Pin TFBGA Tray"
P1: library part CMP-002-00280-1, "WR-PHD Pin Header, THT, Vertical, pitch 2.54mm, 1 Row, 10P", Contact Resistance=20mOhm, Manufacturer="Wurth Elektronik", Operating Temperature Max=105°C, Operating Temperature Min=-40°C, Rated Current=3A, Withstanding Voltage=500V, Working Voltage=250V, Category="Board-to-Board Connectors", Component Type=Standard, ComponentLink1Description="Website Link", ComponentLink1URL=https://www.we-online.com/redexpert/article/61301011121?ad, ComponentLink2Description="Datasheet Link", ComponentLink2URL=https://www.we-online.com/redexpert/spec/61301011121?ad, Design Item ID=61301011121, Gender="Pin Header", Manufacturer Part Number=61301011121, Match Code=WR-PHD, Mount="Through Hole", Number of Rows=1, Orientation=Vertical, Packaging=Bag, Pin Count=10, Pins=10, Pitch=2.54mm, Source=WR-PHD.SchLib
P2: library part CMP-002-00265-1, "WR-PHD Pin Header, THT, Vertical, pitch 2.54mm, 1 Row, 8P", Contact Resistance=20mOhm, Manufacturer="Wurth Elektronik", Operating Temperature Max=105°C, Operating Temperature Min=-40°C, Rated Current=3A, Withstanding Voltage=500V, Working Voltage=250V, Category="Board-to-Board Connectors", Component Type=Standard, ComponentLink1Description="Website Link", ComponentLink1URL=https://www.we-online.com/redexpert/article/61300811121?ad, ComponentLink2Description="Datasheet Link", ComponentLink2URL=https://www.we-online.com/redexpert/spec/61300811121?ad, Design Item ID=61300811121, Gender="Pin Header", Manufacturer Part Number=61300811121, Match Code=WR-PHD, Mount="Through Hole", Number of Rows=1, Orientation=Vertical, Packaging=Bag, Pin Count=8, Pins=8, Pitch=2.54mm, Source=WR-PHD.SchLib
R1 R3: library part RN73C1E200RBTD, "RES SMD 200 OHM 0.1% 1/16W 0402", Device Package="0402 (1005 Metric)", Manufacturer="TE Connectivity Passive Product", Operating Temperature="-55°C ~ 155°C", Power (Watts)="0.063W, 1/16W", Resistance="200 Ohms", Supplier Device Package=0402, Supplier Part Number 1=A121688CT-ND, Temperature Coefficient=±10ppm/°C, Tolerance=±0.1%, ComponentLink1Description=Datasheet, ComponentLink1URL=https://www.te.com/commerce/DocumentDelivery/DDEController?Action=srchrtrv&DocNm=1773270&DocType=DS&DocLang=English, ComponentLink2Description="DigiKey Link", ComponentLink2URL=https://www.digikey.com/en/products/detail/te-connectivity-passive-product/RN73C1E200RBTD/2375214, Composition="Thin Film", Height - Seated (Max)="0.014\" (0.35mm)", lastupdated="2/9/2024 8:30:22 PM", Lifecycle Status=Active, Minimum Order=1, Number of Terminations=2, Package / Case="0402 (1005 Metric)", Packaging=TapeAndReel, Part Number=RN73C1E200RBTD, Part Status=Active, partid=2956, Price=0.26, Series="RN73, Holsworthy", Size / Dimension="0.039\" L x 0.020\" W (1.00mm x 0.50mm)", Supplier 1=DigiKey
R2: library part RR0510P-202-D, "RES SMD 2K OHM 0.5% 1/16W 0402", Device Package="0402 (1005 Metric)", Manufacturer=Susumu, Operating Temperature="-55°C ~ 125°C", Power (Watts)="0.063W, 1/16W", Resistance="2 kOhms", Supplier Part Number 1=RR05P2.0KDCT-ND, Temperature Coefficient=±25ppm/°C, Tolerance=±0.5%, ComponentLink1Description=Datasheet, ComponentLink1URL=http://www.susumu.co.jp/common/pdf/n_catalog_partition05_en.pdf, ComponentLink2Description="DigiKey Link", ComponentLink2URL=https://www.digikey.com/en/products/detail/susumu/RR0510P-202-D/432404, Composition="Thin Film", Height - Seated (Max)="0.016\" (0.40mm)", lastupdated="2/9/2024 8:30:21 PM", Lifecycle Status=Active, Minimum Order=1, Number of Terminations=2, Package / Case="0402 (1005 Metric)", Packaging=TapeAndReel, Part Number=RR0510P-202-D, Part Status=Active, partid=3227, Price=0.01, Series=RR, Size / Dimension="0.039\" L x 0.020\" W (1.00mm x 0.50mm)", Supplier 1=DigiKey
R4 R5 R6 R7 R8 R11: library part RP73PF1E10KBTD, "RES 10K OHM 0.1% 1/10W 0402", Device Package="0402 (1005 Metric)", Manufacturer="TE Connectivity Passive Product", Operating Temperature="-55°C ~ 155°C", Power (Watts)="0.1W, 1/10W", Resistance="10 kOhms", Supplier Device Package=0402, Supplier Part Number 1=A127415CT-ND, Temperature Coefficient=±25ppm/°C, Tolerance=±0.1%, ComponentLink1Description=Datasheet, ComponentLink1URL=https://www.te.com/commerce/DocumentDelivery/DDEController?Action=srchrtrv&DocNm=1773272&DocType=DS&DocLang=English, ComponentLink2Description="DigiKey Link", ComponentLink2URL=https://www.digikey.com/en/products/detail/te-connectivity-passive-product/RP73PF1E10KBTD/8260957, Composition="Thin Film", Height - Seated (Max)="0.014\" (0.35mm)", lastupdated="2/9/2024 8:30:24 PM", Lifecycle Status=Active, Minimum Order=1, Number of Terminations=2, Package / Case="0402 (1005 Metric)", Packaging=TapeAndReel, Part Number=RP73PF1E10KBTD, Part Status=Active, partid=2434, Price=0.08, Series="RP73, Holsworthy", Size / Dimension="0.039\" L x 0.020\" W (1.00mm x 0.50mm)", Supplier 1=DigiKey
R9: library part CR0402AJW-101GAS, "RESA-AS 0402 100R 5% 63MW TC200", Device Package="0402 (1005 Metric)", Manufacturer="Bourns Inc.", Operating Temperature="-55°C ~ 155°C", Power (Watts)="0.063W, 1/16W", Ratings=AEC-Q200, Resistance="100 Ohms", Supplier Device Package=0402, Supplier Part Number 1=CR0402AJW-101GASCT-ND, Temperature Coefficient=±200ppm/°C, Tolerance=±5%, ComponentLink1Description=Datasheet, ComponentLink1URL=//media.digikey.com/pdf/Data%20Sheets/Bourns%20PDFs/CRyyyyA-AS_Model_DS.pdf, ComponentLink2Description="DigiKey Link", ComponentLink2URL=https://www.digikey.com/en/products/detail/bourns-inc/CR0402AJW-101GAS/10240111, Composition="Thick Film", Features="Anti-Sulfur, Automotive AEC-Q200, Moisture Resistant", Height - Seated (Max)="0.015\" (0.37mm)", lastupdated="2/9/2024 8:30:14 PM", Lifecycle Status=Active, Minimum Order=1, Number of Terminations=2, Package / Case="0402 (1005 Metric)", Packaging=CutTape, Part Number=CR0402AJW-101GAS, Part Status=Active, partid=4699, Price=0.01, Series=CR0402A-AS, Size / Dimension="0.039\" L x 0.020\" W (1.00mm x 0.50mm)", Supplier 1=DigiKey
R10: library part CPF0402B30KE1, "RES SMD 30K OHM 0.1% 1/16W 0402", Device Package="0402 (1005 Metric)", Manufacturer="TE Connectivity Passive Product", Operating Temperature="-55°C ~ 155°C", Power (Watts)="0.063W, 1/16W", Resistance="30 kOhms", Supplier Device Package=0402, Supplier Part Number 1=A102785CT-ND, Temperature Coefficient=±25ppm/°C, Tolerance=±0.1%, ComponentLink1Description=Datasheet, ComponentLink1URL=https://www.te.com/commerce/DocumentDelivery/DDEController?Action=srchrtrv&DocNm=1773200&DocType=DS&DocLang=English, ComponentLink2Description="DigiKey Link", ComponentLink2URL=https://www.digikey.com/en/products/detail/te-connectivity-passive-product/CPF0402B30KE1/2381839, Composition="Thin Film", Height - Seated (Max)="0.014\" (0.35mm)", lastupdated="2/9/2024 8:30:20 PM", Lifecycle Status=Active, Minimum Order=1, Number of Terminations=2, Package / Case="0402 (1005 Metric)", Packaging=TapeAndReel, Part Number=CPF0402B30KE1, Part Status=Active, partid=3356, Price=0.13, Series="CPF, Neohm", Size / Dimension="0.039\" L x 0.020\" W (1.00mm x 0.50mm)", Supplier 1=DigiKey
SW1 SW2: library part CMP-011-00015-1, "Keypad Switch, 1 Switches, SPST, Momentary-tactile, 0.05A, 12VDC, 1.99N, Solder Terminal, Surface Mount-straight", Max Operating Temperature=70°C, Min Operating Temperature=-25°C, Mounting Technology="Surface Mount", RoHS Compliant=Yes
U1: library part CMP-00029-00010-2, "Power Supply Support Circuit, Adjustable, 1 Channel, 3.45, PDSO5", Battery Voltage=4.2V, Case/Package=SOT-23-5, Charge Current Max=500mA, Max Operating Temperature=85°C, Min Operating Temperature=-40°C, Voltage Supply Max=6V, Battery Chemistry="Lithium Ion/Polymer", Mounting Technology="Surface Mount", Pins=5, RoHS Compliant=Yes
U2: library part CMP-010-00025-8, "Serial Switch/Digital Sensor, 16 Bit(s), 1Cel, Rectangular, 8 Pin, Surface Mount", Max Operating Temperature=125°C, Max Supply Voltage=5.5V, Min Operating Temperature=-40°C, Min Supply Voltage=2.7V, Mounting Technology="Surface Mount", Pins=8, RoHS Compliant=Yes, Sensor Type="TEMPERATURE SENSOR,SWITCH/DIGITAL OUTPUT,SERIAL"
U3: library part CMP-031-00010-2, "Bluetooth, WiFi 802.11b/g/n, Bluetooth v5.0 Transceiver Module 2.412GHz ~ 2.484GHz PCB Trace Surface Mount", Case/Package="53-SMD Module", Design Item ID=ESP32-C3-MINI-1-H4, Manufacturer Part Number=ESP32-C3-MINI-1-H4
U4: library part CMP-010-00029-1, "Consumer Circuit, PBGA5", Case/Package=LGA, Max Operating Temperature=70°C, Max Supply Voltage=3.6V, Min Operating Temperature=-40°C, Min Supply Voltage=1.62V, Pins=5, RoHS Compliant=Yes
U5: library part CMP-010-00031-4, "Open-drain, CMOS, 14 Pin"
U6: library part CMP-010-00030-2, "Piezoresistive Sensor, Absolute, 2.9Psi Min, 15.9Psi Max, 0.1-0.9V, Rectangular, Surface Mount"
U7: library part CMP-00025-00003-3, "RFID Transponder IC 13.56MHz ISO 14443 I2C 3.3V 8-XFQFN Exposed Pad", Case/Package=8-XFQFN, Frequency=13.56MHz, Max Operating Temperature=105°C, Min Operating Temperature=-40°C, Voltage Rating=3.3V, Mounting Technology="Surface Mount", Pins=8, RoHS Compliant=Yes

## Free pads (board coordinates)
  round 4.064 hole 3.175: MT(32.918,10.312)

## Via types
v1: diameter 0.5, hole 0.3, Top Layer to Bottom Layer, tented both sides, 47 vias

## Nets (pads, with @x,y where several pads share a name; then routed paths per layer and width w, separated by ;. In a path a pad name is that pad's centre, name@x,y a point inside that pad or via, vN(x,y) a via of type N, cw(c..) or ccw(c..) an arc to the next point about the centre after c; other vN are vias at no path point)
+3V3: C4.2 C5.2 C6.2 C7.2 C8.2 C9.2 C10.2 C11.2 C13.2 IC2.5 P1.1 P2.1 R5.2 R6.2 R7.2 R8.2 U2.8 U3.3 U4.2 U5.8 U5.12 U6.1 U6.4 U7.6 | length 6.4
  Top Layer w0.3: U5.8 28.11,2.217 cw(c28.11,1.946) C8.2
  Top Layer w0.4: U3.3 v1(3.48,-4.934)
  Top Layer w0.45: R5.2 v1(13.05,-5.15) ; R8.2 v1(13.05,-1.507) ; v1(19.202,-4.504) C4.2 19.206,-3.847 20.597,-3.847 IC2.5
+VBAT: C2.2 IC1.3 J2.2 R10.2 U1.3
  other v1: 25.912,-7.94
+VUSB: C1.2 D2.1 D3.1 IC1.1 J1.1 R1.2 R4.1 U1.4 | length 14.8
  Top Layer w0.4: U1.4 23.3,-5.235 23.375,-5.16 C1.2 25.549,-5.16 26.279,-4.429 27.558,-4.429 28.45,-3.538 IC1.1 29.025,-2.9 29.025,-1.995 D2.1 29.48,-1.3 J1.1 ; 29.025,-2.825 29.625,-3.425 R4.1 30.4,-3.5 30.714,-3.814 30.714,-5.769 R1.2
GND: C1.1 C2.1 C3.1 C4.1 C5.1 C6.1 C7.1 C8.1 C9.1 C10.1 C11.1 C12.2 C13.1 C14.1 IC2.2 J1.5 J1.S1 J1.S2 J1.S3 J1.S4 J1.S5 J1.S6 J2.1 P1.2 P2.2 R2.2 R3.1 R4.2 R11.1 SW1.2 SW2.1 U1.2 U2.4 U2.5 U2.6 U2.7 U2.9 U3.1 U3.2 U3.11 U3.14 U3.36 U3.37 U3.38 U3.39 U3.40 U3.41 U3.42 U3.43 U3.44 U3.45 U3.46 U3.47 U3.48 U3.49 U3.50 U3.51 U3.52 U3.53 U3.54 U3.55 U3.56 U3.57 U3.58 U3.59 U3.60 U3.61 U4.4 U4.5 U5.1 U5.2 U5.3 U5.6 U5.7 U5.10 U5.11 U6.3 U7.2 | length 27.1
  Top Layer w0.4: U3.58 0.93,-4.8 U3.48 1.18,-4.8 1.182,-4.798 v1(1.88,-4.798) U3.1 ; U3.61 0.93,4.8 U3.36 v1(1.88,4.8) ; U3.47 v1(2.68,-4) ; U3.46 v1(1.88,-3.2) ; U3.45 v1(2.68,-2.4) ; U3.44 v1(1.88,-1.6) ; U3.43 v1(2.68,-0.8) ; U3.42 v1(1.88,0) ; U3.41 v1(2.68,0.8) ; U3.40 v1(1.88,1.6) ; U3.39 1.83,2.4 v1(2.68,2.4) ; U3.38 v1(1.88,3.2) ; U3.37 v1(2.68,4)
  Top Layer w0.45: v1(19.2,-2.2) C4.1 ; v1(20.3,-7.3) R2.2 ; U1.2 v1(22.35,-7.15) ; v1(22.4,-2.9) IC2.2 ; C2.1 v1(25.2,-7.06) ; C1.1 v1(25.2,-6.04) ; v1(28.75,-9.4) 28.75,-8.725 J2.1 ; v1(29.625,-5.4) R4.2
  other v1: 9.8,-3.2 32.8,-3.2 16.7,-2.9 34,0.4 32.8,3.3 31.5,3.9
GPIO2: P2.3 U3.5 | length 10.2
  Top Layer w0.2: v1(5.075,-4.83) 5.078,-4.833 5.078,-5.898 U3.5
  Bottom Layer w0.2: v1(5.075,-4.83) 5.83,-4.83 10.16,-9.16 P2.3
GPIO3: P2.4 U3.6 | length 13.1
  Top Layer w0.2: v1(5.875,-4.03) 5.877,-4.033 5.877,-5.897 U3.6
  Bottom Layer w0.2: v1(5.875,-4.03) 7.63,-4.03 12.7,-9.1 P2.4
GPIO4: U3.18 | length 1
  Top Layer w0.2: v1(9.8,0) U3.18
GPIO5: U3.19 | length 1.8
  Top Layer w0.2: v1(9,0.8) U3.19
GPIO6: U3.20 | length 1
  Top Layer w0.2: v1(9.8,1.6) U3.20
GPIO7: U3.21 | length 1.8
  Top Layer w0.2: v1(9,2.4) U3.21
GPIO8: U3.22 | length 1
  Top Layer w0.2: v1(9.8,3.2) U3.22
GPIO9: U3.23 | length 1
  Top Layer w0.2: v1(9.8,3.925) 9.837,3.962 10.743,3.962 U3.23
GPIO10: U3.16 | length 1
  Top Layer w0.4: v1(9.8,-1.6) U3.16
I2S_CLK: U4.3
I2S_DATA: R9.2
INT_ICM: U5.4
INT_MCP: U2.3
INT_MPL: U6.6
NC: U3.4 U3.7 U3.9 U3.10 U3.15 U3.17 U3.24 U3.25 U3.28 U3.29 U3.32 U3.33 U3.34 U3.35
NetC12_1: C12.1 U6.2
NetD1_1: D1.1 R1.1 | length 1.3
  Top Layer w0.2: R1.1 31.702,-6.925 D1.1@31.902,-7.125
NetD1_2: D1.2 U1.1 | length 16
  Top Layer w0.2: v1(31.85,-4.75) 31.85,-5.573 D1.2
  Top Layer w0.45: U1.1 v1(21.4,-7.15)
  Bottom Layer w0.2: v1(21.4,-7.15) 21.4,-8.15 22.213,-8.962 26.513,-8.962 28.6,-6.875 30.709,-6.875 31.852,-5.732 31.852,-4.752 v1(31.85,-4.75)
NetD3_2: D3.2 R3.2
NetR2_1: R2.1 U1.5 | length 1.1
  Top Layer w0.2: U1.5@21.35,-5.425 U1.5
  Top Layer w0.45: R2.1 U1.5@21.35,-5.425
NetR9_1: R9.1 U4.1
RST: R5.1 SW2.2 U3.8 | length 8
  Top Layer w0.2: U3.8 7.483,-5.903 7.483,-6.683 7.95,-7.15 R5.1@12.825,-7.15 ; R5.1 13.975,-7.15 14.275,-6.85 SW2.2
RX: P1.3 U3.30 | length 10.4
  Top Layer w0.2: v1(5.875,4.825) 5.878,4.828 5.878,5.898 U3.30
  Bottom Layer w0.2: v1(5.875,4.825) 7.5,4.825 10.16,7.485 P1.3
SCL: R6.1 U2.2 U5.13 U6.8 U7.3 | length 0
  Top Layer w0.203: U5.13@25.507,3.879 U5.13@25.509,3.877
SDA: R7.1 U2.1 U5.14 U6.7 U7.5 | length 0
  Top Layer w0.203: U5.14@25.007,3.838 U5.14@25.024,3.856
TX: P1.4 U3.31 | length 14.7
  Top Layer w0.2: v1(5.075,3.975) 5.078,3.978 5.078,5.898 U3.31
  Bottom Layer w0.2: v1(5.075,3.975) 8.7,3.975 12.7,7.975 P1.4
USB_D_N: J1.2 U3.26 | length 31.6
  Top Layer w0.2: U3.26@9.08,5.842 9.08,6.1 8.956,6.224 8.92,6.224 8.855,6.289 8.855,7.185 8.972,7.302 12.183,7.302 12.3,7.185 12.3,-0.182 12.594,-0.476 30.737,-0.476 30.911,-0.65 J1.2
USB_D_P: J1.3 U3.27 | length 32.1
  Top Layer w0.2: U3.27@8.28,5.842 8.28,6.042 8.553,6.315 8.553,7.31 8.847,7.604 12.308,7.604 12.602,7.31 12.602,-0.057 12.719,-0.174 30.737,-0.174 30.911,0 J1.3
USR: P2.5 R8.1 SW1.1 U3.13 | length 19.6
  Top Layer w0.2: v1(8.9,-4) U3.13 12.632,-4 13.05,-3.582 R8.1 13.975,-3.507 14.275,-3.207 SW1.1
  Bottom Layer w0.2: v1(8.9,-4) 13,-4 17.78,-8.78 17.78,-11.43
VBAT_MEAS: C14.2 R10.1 R11.2 U3.12 | length 1
  Top Layer w0.2: v1(9.8,-4.8) U3.12
VIN: C3.2 D2.2 IC1.2 IC2.1 IC2.3 | length 10
  Top Layer w0.2: IC2.1 22.067,-3.85 21.8,-3.583 21.8,-2.217 22.067,-1.95 IC2.3
  Top Layer w0.45: IC2.1 24.232,-3.85 24.5,-3.582 C3.2 25.965,-2.84 ; D2.2 25.965,-1.955 25.965,-2.84 ; IC1.2 26.55,-3.425 26.1,-2.975 25.965,-2.84
pads on no net: D4.1 D4.2 D4.3 D4.4 D4.5 D4.6 D4.7 D4.8 IC2.4 J1.4 J2.3 J2.4 P1.5 P1.6 P1.7 P1.8 P1.9 P1.10 P2.6 P2.7 P2.8 U4. U5.9 U6.5 U7.1 U7.4 U7.7 U7.8

## Polygon pours and split planes (outlines as drawn)
GND on Top Layer "NONET_L-01_P-001" (solid, pour order 15): 19.7,-3.2 19.625,-3.275 18.625,-3.275 18.475,-3.425 18.475,-5.875 18.7,-6.1 20.7,-6.1 20.8,-6.2 20.8,-7.5 20.7,-7.6 16.4,-7.6 16.3,-7.5 16.3,-1.1 16.4,-1 24.9,-1 25,-1.1 25,-2.2 24.9,-2.3 24.1,-2.3 24,-2.2 24,-1.6 23.9,-1.5 19.8,-1.5 19.7,-1.6
+VUSB on Top Layer "NONET_L-01_P-001" (solid, remove dead copper, pour order 10): 30.1,-4.1 30.2,-4 30.2,-1.6 30.275,-1.525 32.075,-1.525 32.075,-1.075 27.925,-1.075 27.8,-1.2 27.8,-1.4 27.8,-4.1 29.1,-4.1
+3V3 on Top Layer "NONET_L-01_P-001" (solid, pour order 14): 27.9,2.6 27.9,1.9 27.9,1.6 ccw(c28,1.6) 28,1.5 29.8,1.5 ccw(c29.8,1.6) 29.9,1.6 29.9,2.3 ccw(c29.8,2.3) 29.8,2.4 29,2.4 cw(c29,2.5) 28.9,2.5 28.9,3.5 ccw(c28.8,3.5) 28.8,3.6 28,3.6 ccw(c28,3.5) 27.9,3.5
VIN on Top Layer "NONET_L-01_P-001" (solid, pour order 4): 24,-2.55 24.1,-2.45 25.1,-2.45 25.2,-2.35 25.2,-1.1 25.3,-1 27,-1 27.1,-1.1 27.1,-4.2 27,-4.3 26.9,-4.3 26,-4.3 25.8,-4.3 22.6,-4.3 22.5,-4.2 22.5,-3.5 22.6,-3.4 23.9,-3.4 24,-3.3
+3V3 on Top Layer "NONET_L-01_P-001" (solid, pour order 7): 19.7,-4.4 19.8,-4.3 21.3,-4.3 21.4,-4.2 21.4,-3.5 21.3,-3.4 18.7,-3.4 18.6,-3.5 18.6,-4.7 18.7,-4.8 18.9,-4.8 19.6,-4.8 19.7,-4.7
+VBAT on Top Layer "NONET_L-01_P-001" (solid, pour order 9): 22.8,-9 22.9,-9.1 27.999,-9.1 ccw(c28,-9.071) 28,-9.1 28.1,-9 28.1,-5 28,-4.9 27,-4.9 26.9,-5 26.9,-7.4 26.8,-7.5 22.9,-7.5 22.8,-7.6
GND on Mid Layer 1 "NONET_L-01_P-001" (solid, shelved, pour order 12): 37.487,13.95 37.487,-14.05 -2.513,-14.05 -2.513,13.95 0.487,13.95
+3V3 on Mid Layer 2 "NONET_L-01_P-001" (solid, shelved, pour order 16): -1,14 36,14 36,-14 -1,-14

## Other copper
Top Layer:
  text "DESIGNED  / BY AKAREZ 6/25" at 0.925,7.625 h1.02
Bottom Layer:
  region: 26.228,-3.685 25.831,-3.685 25.831,-3.689 25.827,-3.689 25.827,-3.768 25.835,-3.768 25.835,-3.771 25.989,-3.771 25.989,-4.224 25.992,-4.224 25.992,-4.228 25.996,-4.228 25.996,-4.232 26.004,-4.232 26.004,-4.228 26.079,-4.228 26.079,-4.22 26.083,-4.22 26.083,-3.783 26.079,-3.783 26.079,-3.779 26.083,-3.779 26.083,-3.771 26.236,-3.771 26.236,-3.768 26.244,-3.768 26.244,-3.689 26.24,-3.689 26.24,-3.685 26.232,-3.685
  region: 383 vertices and 0 holes, not listed, extent 25.178,-4.232 25.749,-3.685
  region: 4703 vertices and 1 holes, not listed, extent 24.474,-3.929 32.903,3.784

## Silkscreen, mask and mechanical layers (free items; w line width, h text height)
Top Overlay:
  lines w0.15: 25.125,-1.882 25.125,-0.968 25.912,-0.968 ; 27.258,-6.604 27.758,-6.604 ; 27.508,-6.854 27.508,-6.354 ; 31.952,-4.826 32.602,-4.826 32.602,-5.401
  text "USR" at 14.502,-1.184 h1.5
  text "RST" at 14.502,-9.617 h1.5
Bottom Overlay:
  drawing of 20 lines, arcs and shapes, not listed
Mechanical 1:
  the board outline again, w0.254